# Altium PCB ESP32i.PcbDoc
Units mil, origin at the board's own origin, x right, y up, seen from the top; angles counter-clockwise.
Board outline 1204 x 2188 mil, 2 copper layers (Top Layer, Bottom Layer); 31 components, 46 nets, 190 pads, 88 vias.
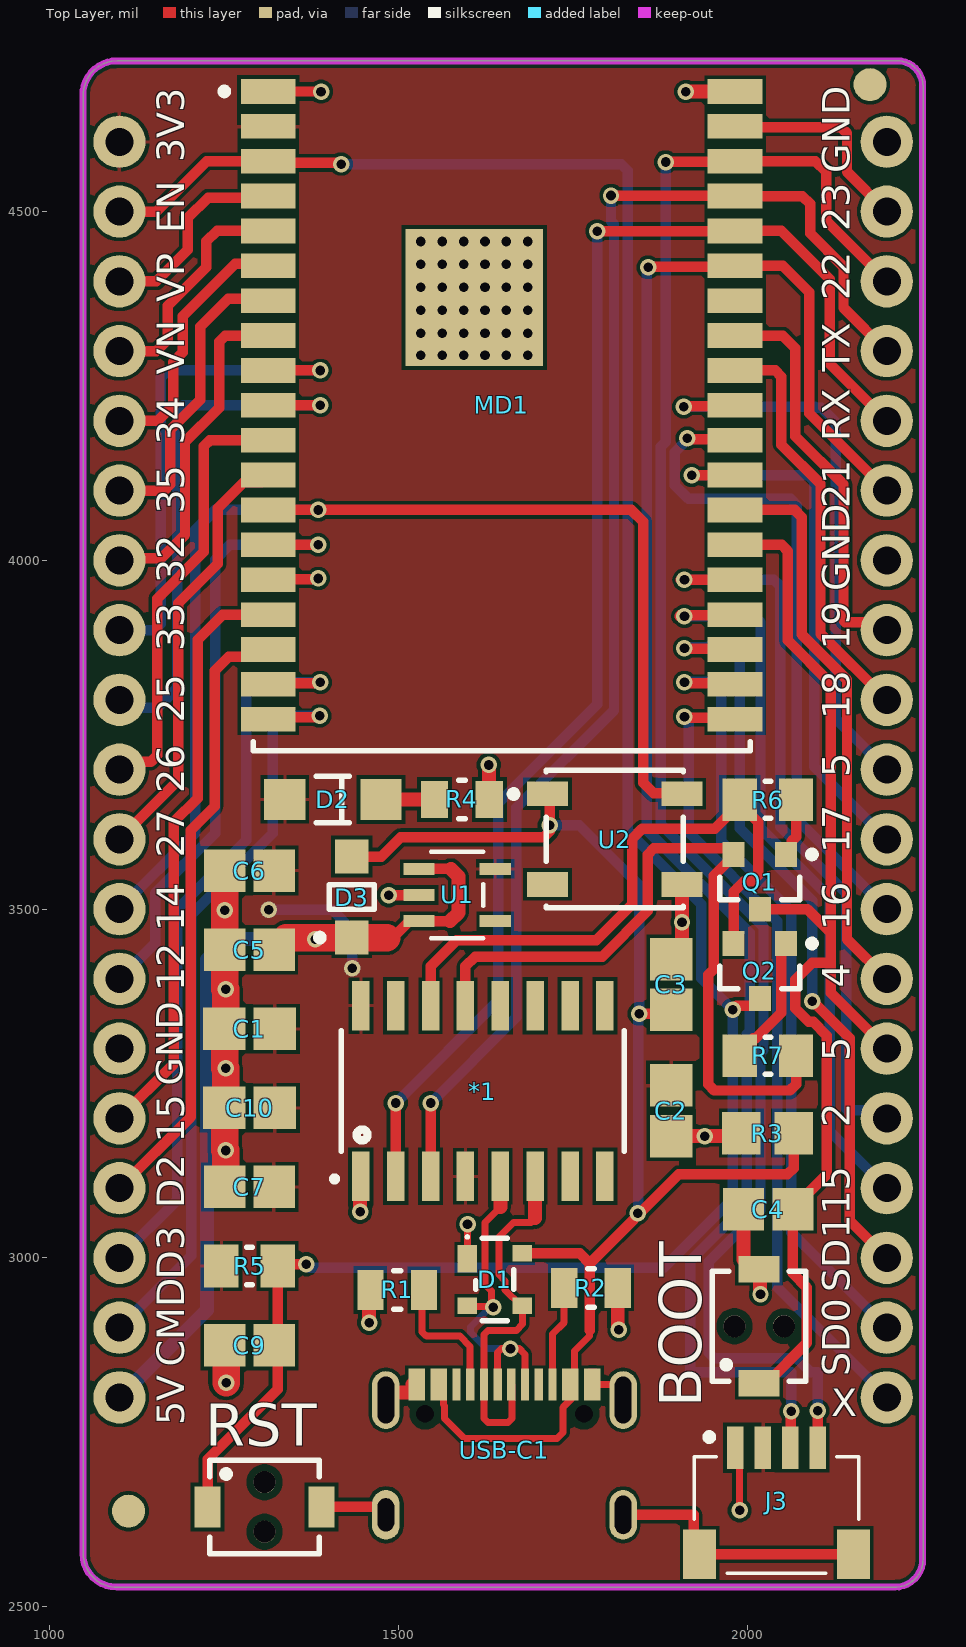
[diagram p0: Top Layer view]
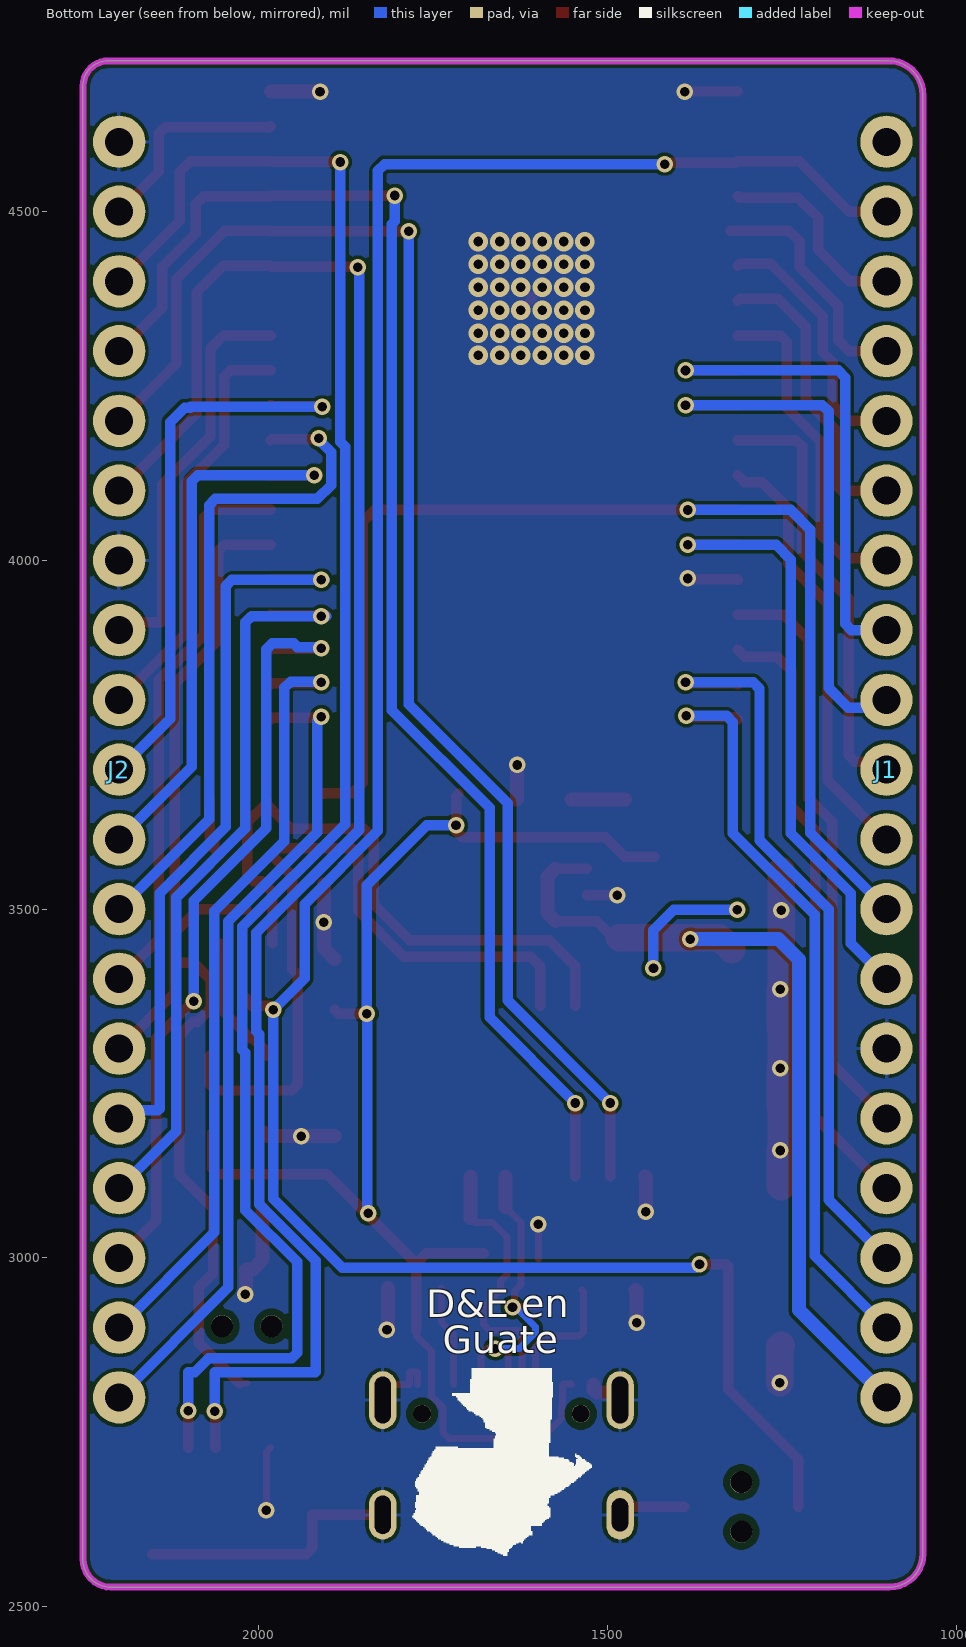
[diagram p1: Bottom Layer view, seen from below]

## Layer stack, top to bottom
Top Solder: solder mask 0.4, Solder Resist, Dk 3.5
Top Layer: signal copper 1.4
Dielectric 1: dielectric 12.6, FR-4, Dk 4.8
Bottom Layer: signal copper 1.4
Bottom Solder: solder mask 0.4, Solder Resist, Dk 3.5

## Board outline
1096,2528 cw(c1096,2576) 1048,2576 1048,4667 cw(c1097,4667) 1097,4716 2216,4716 cw(c2216,4680) 2252,4680 2252,2568 cw(c2212,2568) 2212,2528

## Design rules (kind name [scope] priority, off if disabled: settings)
BoardOutlineClearance [All] p1: gap=7.87 ignorepadtopadclearanceinfootprint=FALSE
Clearance [All] p1: gap=5 ignorepadtopadclearanceinfootprint=FALSE except(5.2: Arc-Fill Arc-Poly Arc-Region Track-Fill Track-Poly Track-Region SMDPad-Fill SMDPad-Poly SMDPad-Region THPad-Fill THPad-Poly THPad-Region Via-Fill Via-Poly Via-Region Fill-Fill Fill-Poly Fill-Region Poly-Poly Poly-Region Region-Region; 9.84: Arc-Hole Track-Hole SMDPad-Hole THPad-Hole Via-Hole Fill-Hole Poly-Hole Region-Hole Text-Hole)
ComponentClearance [All] p1: gap=5 collisioncheckmode=3 verticalgap=5 showdistances=TRUE
DiffPairsRouting [All] p1: maxlimit=10 minlimit=5 mostfreqgap=5 toplayer_minwidth=5 toplayer_maxwidth=1000 toplayer_prefwidth=5 bottomlayer_minwidth=5 bottomlayer_maxwidth=1000 bottomlayer_prefwidth=5 maxuncoupledlength=500
Height [All] p1: minheight=0 maxheight=71497.94 prefheight=500
HoleSize [All] p1: absolutevalues=TRUE maxlimit=248.03 minlimit=11.81 maxpercent=80.000 minpercent=20.000
HoleToHoleClearance [All] p1: gap=9.84 allowstackedmicrovias=FALSE
MinimumAnnularRing [All] p1: minimumring=3
MinimumSolderMaskSliver [All] p1: minsoldermaskwidth=0
PlaneClearance [All] p1: clearance=5
PlaneConnect PlaneConnectPowerPads [InPadClass('PowerPads')] p1: planeconnectstyle=Direct reliefexpansion=20 reliefentries=4 reliefconductorwidth=10 reliefairgap=10
PlaneConnect [All] p2: pad.planeconnectstyle=Relief pad.reliefexpansion=11.81 pad.reliefentries=4 pad.reliefconductorwidth=5 pad.reliefairgap=5 via.planeconnectstyle=Direct via.reliefexpansion=11.81 via.reliefentries=4 via.reliefconductorwidth=5 via.reliefairgap=5
PolygonConnect PolygonConnectPowerPads [All vs (InPadClass('PowerPads'))] p1: connectstyle=Direct reliefconductorwidth=10 reliefentries=4 polygonreliefangle="90 Angle" airgapwidth=10
PolygonConnect [All] p2: thpad.connectstyle=Relief thpad.reliefconductorwidth=5 thpad.reliefentries=4 thpad.polygonreliefangle="90 Angle" thpad.airgapwidth=5 smdpad.connectstyle=Relief smdpad.reliefconductorwidth=5 smdpad.reliefentries=4 smdpad.polygonreliefangle="90 Angle" smdpad.airgapwidth=5 via.connectstyle=Direct via.reliefconductorwidth=5 via.reliefentries=4 via.polygonreliefangle="90 Angle" via.airgapwidth=5
RoutingVias [All] p1: holewidth=11.81 width=23.62 viastyle="Through Hole" minholewidth=13.78 minwidth=23.62 maxholewidth=23.62 maxwidth=259.84
SilkToSilkClearance [All] p1: silktosilkclearance=0
SilkToSolderMaskClearance [IsPad] p1: minsilkscreentomaskgap=5 clearancetoexposedcopper=TRUE
SolderMaskExpansion [All] p1: expansion=2.95 istentingtop=FALSE
Width [All] p1: maxlimit=1000 minlimit=5 preferedwidth=15 minimp=50.000000 maximp=50.000000 favimp=50.000000
20 further rules are at their usual default settings.

## Components (designator, comment, footprint, x,y, rotation, side; value= is the part's Value field where it differs from the comment)
*1 "CH340B" CH340B 1621,3239.24 r90 top
BOOT "IO0" SMT_SW_PTS_820 2017,2902 r90 top (schematic designator S1)
C1 "0.1 uF" CAPC2013X94X50ML20T25 1286.45,3328.39 r0 top
C2 "08055C104KAT2A" CAPC2013X94X50ML20T25 1891,3211 r90 top
C3 "08055C104KAT2A" CAPC2013X94X50ML20T25 1891,3392 r270 top
C4 "1µF" CAPC2013X145X50ML20T25 2030,3070 r0 top
C5 "10µF" CAPC2013X140X50ML20T25 1286.45,3441.74 r0 top
C6 "10µF" CAPC2013X140X50ML20T25 1286.45,3555.09 r0 top
C7 "1µF" CAPC2013X145X50ML20T25 1286.45,3101.7 r0 top
C9 "10µF" CAPC2013X145X50ML20T25 1286.45,2875 r0 top
C10 "0.1 uF" CAPC2013X94X50ML20T25 1286.45,3215.04 r0 top
D1 "PRTR5V0U2X,215" NXP-SOT143B-4_V 1638,2969 r0 top
D2 "HSMG-C150" FP-HSMG-C150-MFG 1406,3657.32 r180 top
D3 "MBR120ESFT1G" ONSC-SOD-123FL-2-498_V 1433,3517.32 r90 top
J1 "PH1-19-UA" PH1-19-UA 1100,4600 r270 bottom
J2 "PH1-19-UA" PH1-19-UA 2200,4600 r270 bottom
J3 "SM04B-SRSS-TB(LF)(SN)" JST_SM04B-SRSS-TB(LF)(SN) 2042,2728 r0 top
MD1 "ESP32-WROVER-I" FP-ESP32-WROVER-I-MFG 1648,4347 r0 top
Q1 "MMBT2222ALT1G" ONSC-SOT-23-3-318-08_V 2018,3539 r270 top
Q2 "MMBT2222ALT1G" ONSC-SOT-23-3-318-08_V 2018,3411.37 r270 top
R1 "5.1K" FP-CRCW0805-e3-MFG 1498,2954 r0 top
R2 "5.1K" FP-CRCW0805-e3-MFG 1776,2957 r180 top
R3 "100k" RESC2013X60X40ML20T25 2029,3179 r0 top
R4 "RP73D2A80R6BTG" FP-RP732A-MFG 1591,3657.32 r180 top value=80.6Ω
R5 "10 k" RESC2013X60X30ML20T20 1286.45,2988.35 r180 top
R6 "10 k" RESC2013X60X30ML20T20 2029.61,3657 r180 top
R7 "10 k" RESC2013X60X30ML20T20 2029.61,3290 r0 top
RST "PTS820J25MSMTRLFS" SMT_SW_PTS_820 1308,2643 r0 top (schematic designator S2)
U1 "XC6210B332MR-G" SOT-25_TOR-M 1584,3520.32 r0 top
U2 "1655" ADA-RGB-1655_V 1810,3600.32 r0 top
USB-C1 "U262-161N-4BVC11" U262-161N-4BVC11 1652,2674 r0 top

## Footprints (in the part's own frame and the unit in brackets; to place one, negate y for a bottom-side part, rotate by r counter-clockwise, add the part's x,y. Pads: shape width x height; smd on the part's side, far side on the other; paste and mask are expansions set on the pad)
ADA-RGB-1655_V [mm] "SMD, 4-Leads, Body 5x5mm"
  rect 1.5x0.9 smd: 1(-2.45,1.65) 2(-2.45,-1.65) 3(2.45,-1.65) 4(2.45,1.65)
  silkscreen extent -3.81,-2.5 2.5,2.5, body extent -2.7,-2.5 2.7,2.5, height 1.68
CAPC2013X94X50ML20T25 [mm] "Chip Capacitor, 2-Leads, Body 2.01x1.25mm, IPC Low Density"
  rect 1.55x1.55 smd: 1(-0.925,0) 2(0.925,0)
  body extent -1.1,-0.72 1.11,0.72, height 0.94
CAPC2013X140X50ML20T25 [mm] "Chip Capacitor, 2-Leads, Body 2.00x1.25mm, IPC Low Density"
  rect 1.5x1.55 smd: 1(-0.9,0) 2(0.9,0)
  body extent -1.1,-0.72 1.1,0.72, height 1.4
CAPC2013X145X50ML20T25 [mm] "Chip Capacitor, 2-Leads, Body 2.00x1.25mm, IPC Low Density"
  rect 1.5x1.55 smd: 1(-0.9,0) 2(0.9,0)
  body extent -1.1,-0.72 1.1,0.72, height 1.45
CH340B [mm] "- USB 2.0 Transceiver 2Mbps SOP-16_150mil USB ICs ROHS"
  rect 1.8x0.64 smd: 1(-3.105,4.445) 2(-3.105,3.175) 3(-3.105,1.905) 4(-3.105,0.635) 5(-3.105,-0.635) 6(-3.105,-1.905) 7(-3.105,-3.175) 8(-3.105,-4.445) 9(3.105,-4.445) 10(3.105,-3.175) 11(3.105,-1.905) 12(3.105,-0.635) 13(3.105,0.635) 14(3.105,1.905) 15(3.105,3.175) 16(3.105,4.445)
  silkscreen extent -3.3,-5.15 2.2,5.5, body extent -3.56,-5.51 3.56,5.51, height 2.14
FP-CRCW0805-e3-MFG [mm]
  rect 0.95x1.45 smd paste+0 mask+0: 1(-0.975,0) 2(0.975,0)
  silkscreen extent -0.13,-0.7 0.13,0.7, body extent -1.55,-0.82 1.55,0.82, height 0.25
FP-ESP32-WROVER-I-MFG [mm]
  rect 2x0.9 smd paste+0 mask+0: 1(-8.5,8.26) 2(-8.5,6.99) 3(-8.5,5.72) 4(-8.5,4.45) 5(-8.5,3.18) 6(-8.5,1.91) 7(-8.5,0.64) 8(-8.5,-0.63) 9(-8.5,-1.9) 10(-8.5,-3.17) 11(-8.5,-4.44) 12(-8.5,-5.71) 13(-8.5,-6.98) 14(-8.5,-8.25) 15(-8.5,-9.52) 16(-8.5,-10.79) 17(-8.5,-12.06) 18(-8.5,-13.33) 19(-8.5,-14.6) 20(8.5,-14.6) 21(8.5,-13.33) 22(8.5,-12.06) 23(8.5,-10.79) 24(8.5,-9.52) 25(8.5,-8.25) 26(8.5,-6.98) 27(8.5,-5.71) 28(8.5,-4.44) 29(8.5,-3.17) 30(8.5,-1.9) 31(8.5,-0.63) 32(8.5,0.64) 33(8.5,1.91) 34(8.5,3.18) 35(8.5,4.45) 36(8.5,5.72) 37(8.5,6.99) 38(8.5,8.26)
  rect 5x5 smd paste+0 mask+0: 39(-1,0.76)
  silkscreen extent -10.22,-15.75 9.05,8.38, body extent -9.6,-15.85 9.6,15.85, height 0.25
FP-HSMG-C150-MFG [mm]
  rect 1.5x1.5 smd paste+0 mask+0: 1(-1.75,0) 2(1.75,0)
  silkscreen extent -0.6,-0.85 0.6,0.85, body extent -2.6,-0.95 2.6,0.95, height 0.25
FP-RP732A-MFG [mm]
  rect 1x1.35 smd paste+0 mask+0: 1(-1,0) 2(1,0)
  silkscreen extent -0.13,-0.7 0.13,0.7, body extent -1.6,-0.8 1.6,0.8, height 0.25
JST_SM04B-SRSS-TB(LF)(SN) [mm]
  rect 0.6x1.55 smd: 1(-1.5,0) 2(-0.5,0) 3(0.5,0) 4(1.5,0)
  rect 1.2x1.8 smd: S1(-2.8,-3.875) S2(2.8,-3.875)
  silkscreen extent -3,-4.57 3,0.48, body extent -3,-4.5 3,0.45, height 2.98
NXP-SOT143B-4_V [mm] "SOT143, 4-Leads, Body 3x1.4mm"
  rect 0.7x1 smd: 1(-1,0.75)
  rect 0.7x0.6 smd: 2(-1,-0.95) 3(1,-0.95) 4(1,0.95)
  silkscreen extent -1.05,-1.5 0.7,1.6, body extent -0.7,-1.5 0.7,1.5, height 1.1
ONSC-SOD-123FL-2-498_V [mm] "SOD, 2-Leads, Body 2.7x1.65mm"
  rect 1.25x1.22 smd: 1(-1.475,0) 2(1.475,0)
  silkscreen extent -1.6,-0.82 0.45,1.28, body extent -1.35,-0.82 1.35,0.82, height 0.98
ONSC-SOT-23-3-318-08_V [mm] "SOT23, 3-Leads, Body 2.92x1.3mm, Pitch 0.95mm"
  rect 0.9x0.8 smd: 1(-1,0.95) 2(-1,-0.95) 3(1,0)
  silkscreen extent -1.12,-1.46 0.65,2.03, body extent -0.65,-1.46 0.65,1.46, height 1.11
PH1-19-UA [mm] "Connector Header Through Hole 19 position 0.100\" (2.54mm)"
  round 1.905 hole 1.02: 1(0,0) 2(2.54,0) 3(5.08,0) 4(7.62,0) 5(10.16,0) 6(12.7,0) 7(15.24,0) 8(17.78,0) 9(20.32,0) 10(22.86,0) 11(25.4,0) 12(27.94,0) 13(30.48,0) 14(33.02,0) 15(35.56,0) 16(38.1,0) 17(40.64,0) 18(43.18,0) 19(45.72,0)
  body extent -1.27,-1.27 46.99,1.27, height 8.54
RESC2013X60X30ML20T20 [mm] "Chip Resistor, 2-Leads, Body 2.00x1.25mm, IPC Low Density"
  rect 1.25x1.55 smd: 1(-1.025,0) 2(1.025,0)
  silkscreen extent -0.1,-0.67 0.1,0.67, body extent -1.1,-0.72 1.1,0.72, height 0.6
RESC2013X60X40ML20T25 [mm] "Chip Resistor, 2-Leads, Body 2.00x1.25mm, IPC Low Density"
  rect 1.4x1.55 smd: 1(-0.95,0) 2(0.95,0)
  body extent -1.1,-0.72 1.1,0.72, height 0.6
SMT_SW_PTS_820 [mm]
  rect 0.95x1.5 smd: 1(-2.075,0) 2(2.075,0)
  round 0.8 hole 0.8 unplated: MH1(0,0.9) MH2(0,-0.9)
  silkscreen extent -2,-1.7 2,1.7, body extent -2.25,-1.55 2.25,1.55, height 2.05
SOT-25_TOR-M [mil]
  rect 44.5x17 smd paste+0 mask+0: 1(-54.75,37.4) 2(-54.75,0) 3(-54.75,-37.4) 4(54.75,-37.4) 5(54.75,37.4)
  silkscreen extent -38,-62 38,62, body extent -55,-57 55,57, height 51
U262-161N-4BVC11 [mm] "USB-C"
  rect 0.3x1.15 smd: A1(-3.35,3.67) A4(-2.55,3.67) A5(-1.25,3.67) A6(-0.25,3.67) A7(0.25,3.67) A8(1.25,3.67) A9(2.55,3.67) A12(3.35,3.67) B1(3.05,3.67) B4(2.25,3.67) B5(1.75,3.67) B6(0.75,3.67) B7(-0.75,3.67) B8(-1.75,3.67) B9(-2.25,3.67) B12(-3.05,3.67)
  rrect100% 1x1.8 hole 1.2 slot 0.6 at 0 deg: S1(-4.32,-1.075)
  rrect100% 1x1.8 on Top Paste: S1(-4.318,-1.092) S1(4.318,-1.067)
  rrect100% 1x2.1 hole 1.7 slot 0.6 at 0 deg: S2(-4.32,3.105) S3(4.32,3.105)
  rrect100% 1x2.1 on Top Paste: S2(-4.318,3.124) S2(4.318,3.124)
  rrect100% 1x1.8 hole 1.4 slot 0.6 at 0 deg: S4(4.32,-1.075)
  round 0 / inner round 0.65 / far side round 0.65 hole 0.65: Un1(2.89,2.605) Un2(-2.89,2.605)
  body extent -4.45,-3.55 4.45,4.01, height 3.33

## Part data
*1: "- USB 2.0 Transceiver 2Mbps SOP-16_150mil USB ICs ROHS", ComponentLink1Description=Datasheet, ComponentLink1URL=https://www.mpja.com/download/35227cpdata.pdf
BOOT: library part PTS820J25MSMTRLFS
C1 C2 C3 C10: library part CMP-2000-05016-1, "Chip Capacitor, Ceramic, 0.1 uF, 10%, 50 V, 0805, RoHS, Tape and Reel", Capacitance=100nF, Case Size/Dimension=0805, Dielectric=X7R, Manufacturer=AVX, Rated Voltage=50V, Tolerance (%)=±10%, Datasheet URL=http://www.farnell.com/datasheets/319609.pdf, Datasheet Version=Sep-07, Manufacturer URL=http://www.avx.com/
C4 C7 C9: library part CMP-2007-01082-1, "1µF ±10% 16V Ceramic Capacitor X7R 0805 (2012 Metric)", Manufacturer=Kemet, Part Number=C0805C105K4RAC7800
C5 C6: library part CMP-2007-03242-1, "10µF ±10% 16V Ceramic Capacitor X5R 0805 (2012 Metric)", Part Number=CL21A106KOQNNNG
D1: library part CMP-2000-05285-1, "Ultra Low Capacitance Double Rail-to-Rail ESD Protection Diode, 5.5 V, 1 pF, -40 to 85 degC, 4-Pin SOT143B, RoHS, Tape and Reel", Capacitance Value=16pF, ESD Protection Voltage=8KV@ContactDisc, Leakage Current=0.1uA, Manufacturer="NXP Semiconductors", Operating Temp Range=-40Cto85C, Operating Temperature Classification=Industrial, Operating Temperature Max Deg. C=85C, Operating Temperature Min Deg. C=-40C, Package / Case=SOT, Reverse Breakdown Voltage=6V, Reverse Stand-off Voltage=5.5V, Configuration=Quad, Datasheet URL=https://datasheet.ciiva.com/4479/prtr5v0u2x-102853-4479461.pdf, Datasheet Version="Rev. 02, 01/2008", Direction Type=Uni-Directional, Leakage Current (Max)=0.1uA, Manufacturer URL=http://www.nxp.com/, Mounting=SurfaceMount, Mounting Style=SurfaceMount, Number of Elements=1, Package Type=SOT, Packaging=TapeandReel, Pin Count=3+Tab, Polarity=Uni-Directional, Product Depth (mm)=1.4mm, Product Height (mm)=1mm, Product Length (mm)=3mm, Rad Hardened=No, Suppressor Type=DiodeArrays, Working Voltage=5.5V, Working Voltage (Max)=5.5V
D2: library part CMP-2000-05061-2, "LED GREEN DIFFUSED 1206 SMD", Colour=Green, Forward Current=20mA, Forward Voltage=2.2V, Manufacturer=Broadcom, Max Junction Temp=+95°C, Power Dissipation=65mW, Reverse Voltage=5V, Temperature="-40°C to +85°C", Temperature Range High=+85°C, Temperature Range Low=-40°C, Automotive=No, Category=Diode, ComponentLink2Description=Datasheet, ComponentLink2URL=https://docs.broadcom.com/docs/AV02-0551EN, Device Class L1=Optoelectronics, Device Class L2=LEDs, Device Class L3=unset, Digikey Description="LED GREEN DIFFUSED 1206 SMD", Height=1.2mm, Ipc Land Pattern Name=DIOCP320160X55, Lead Free=Yes, Led Orientation="Top View", Luminous Intensity=15mcd, Manufacturer Part Number=HSMG-C150, Mouser Description="LED Uni-Color Green 570nm 2-Pin Chip LED T/R", Octopart=https://octopart.com/hsmg-c150-broadcom-71131304, Package=HSMG-C150, Peak Emmision Wavelength=570nm, RoHS=TRUE, Viewing Angle=170°, Wavelength=572nm
D3: library part CMP-1055-00434-1, "Schottky Power Rectifier, 2-Pin SOD-123, Pb-Free, Tape and Reel", Manufacturer="On Semiconductor", ComponentLink1Description="Manufacturer URL", ComponentLink1URL=http://www.onsemi.com/, ComponentLink2Description=Datasheet, ComponentLink2URL=http://www.onsemi.cn/pub_link/Collateral/MBR120ESFT1-D.PDF, ComponentLink3Description="Package Specification", ComponentLink3URL=http://www.onsemi.com/pub_link/Collateral/498-01.PDF, Configuration=Single, DatasheetVersion="Rev. 4", IFSM Max (A)=40, Mounting Technology="Surface Mount", PackageDescription="2-Pin SOD, Body 1.65 x 2.7 mm", PackageReference=SOD-123FL-2-498, PackageVersion="Rev. D, 05/2013", Packing="Tape and Reel", PartNumber=MBR120ESFT1G, RoHS=TRUE
J1 J2: "Connector Header Through Hole 19 position 0.100\" (2.54mm)", Supplier Part Number 1=2057-PH1-19-UA-ND, Supplier 1=Digi-Key
J3: "Connector Header Surface Mount, Right Angle 4 position 0.039 _1.00mm_", Package=None, Availability=Unavailable, MF="JST Sales", MP=SM04B-SRSS-TB_LF__SN_, Price=None, SnapEDA_Link=https://www.snapeda.com/parts/SM04B-SRSS-TB%28LF%29%28SN%29/JST%20Sales%20America%20Inc./view-part/557466/?ref=snap
MD1: library part CMP-194065-000001-1, "SMD MODULE, ESP32-D0WDQ6, 32MBIT", Manufacturer=Espressif, Max Frequency=2484MHz, Max Supply Voltage=3.6V, Min Supply Voltage=2.3V, Nominal Supply Current=500mA, Temperature="-40°C to +85°C", Temperature Range High=+85°C, Temperature Range Low=-40°C, Automotive=No, Category=UNK, ComponentLink2Description=Datasheet, ComponentLink2URL=https://www.espressif.com/sites/default/files/documentation/esp32-wrover_datasheet_en.pdf, Data Rate=150Mbits/s, Device Class L1="Integrated Circuits (ICs)", Device Class L2="RF Semiconductors and Devices", Device Class L3=Transceivers, Digikey Description="SMD MODULE, ESP32-D0WDQ6, 32MBIT", Height=3.4mm, Interface=I2C,SPI,UART,I2S,Other, Lead Free=Yes, Manufacturer Part Number=ESP32-WROVER-I, Number Of Adc Channels=16, Number Of Gpio=20, Octopart=https://octopart.com/esp32-wrover-i-espressif+systems-89171349, Package=ESP32-WROVER-I, RoHS=TRUE, Sensitivity=-98dBm
Q1 Q2: library part CMP-1048-00538-1, "General Purpose Transistor, NPN Silicon, 3-Pin SOT-23, Pb-Free, Tape and Reel", Manufacturer="On Semiconductor", ComponentLink1Description="Manufacturer URL", ComponentLink1URL=http://www.onsemi.com/, ComponentLink2Description=Datasheet, ComponentLink2URL=http://www.onsemi.cn/pub_link/Collateral/MMBT2222LT1-D.PDF, ComponentLink3Description="Package Specification", ComponentLink3URL=http://www.onsemi.cn/pub_link/Collateral/318-08.PDF, DatasheetVersion="Rev. 10", fT Min (MHz)=300, IC Continuous (A)=0.6, Mounting Technology="Surface Mount", PackageDescription="3-Pin Small Outline Transistor, Body 2.92 x 1.3 mm, Pitch 0.95 mm", PackageReference=SOT-23-3-318-08, PackageVersion="Rev. AP, 11/2009", Packing="Tape and Reel", PartNumber=MMBT2222ALT1G, Polarity=NPN, RoHS=TRUE
R1 R2: library part CMP-2001-04024-2, "RES Thick Film, 5.1kΩ, 1%, 0.125W, 100ppm/°C, 0805", Case Code (Imperial)=0805, Case Code (Metric)=2012, Max Operating Temperature=155°C, Max Power Dissipation=125mW, Min Operating Temperature=-55°C, Package Quantity=10, Resistance=5.1kR, Temperature Coefficient=100ppm/°C, Tolerance=1%, Voltage Rating=150V, Case/Package=0805, Composition="Thick Film", Contact Plating=Tin, Depth=1.25mm, Features="Automotive AEC-Q200", Height=0.45mm, Lead Free="Lead Free", Length=2mm, Military Standard=Not, Mount="Surface Mount", Number of Terminations=2, Packaging="Tape and Reel", Power Rating=125mW, Radiation Hardening=No, Termination=SMD/SMT, Voltage Rating (DC)=150V, Weight=0.000194oz, Width=0.049inch
R3: library part CMP-2001-00583-1, "100 kOhms ±0.1% 0.125W, 1/8W Chip Resistor 0805 (2012 Metric) Automotive AEC-Q200 Thin Film", Manufacturer=Panasonic, Part Number=ERA6AEB104V
R4: library part CMP-03211-002377-1, "RESISTOR, 0805 80.6Ω, 0.1% 15ppm/°C", Manufacturer="TE Connectivity", Package=RP732A, Power Rating=0.125W, Resistance=80.6Ω, Temperature="-55°C to 155°C", Temperature Coefficient=15ppm/°C, Temperature Range High=155°C, Temperature Range Low=-55°C, Tolerance=0.1%, Voltage Rating=150V, Automotive=No, Category=Res, ComponentLink2Description=Datasheet, ComponentLink2URL=https://www.te.com/commerce/DocumentDelivery/DDEController?Action=srchrtrv&DocNm=1773272&DocType=DS&DocLang=English, Composition="Thin Film", Device Class L1="Passive Components", Device Class L2=Resistors, Device Class L3="Chip SMD Resistors", Height=0.65mm, Ipc Land Pattern Name=RESC200125X55, Lead Free=Yes, Manufacturer Part Number=RP73D2A80R6BTG, Octopart=https://octopart.com/rp73d2a80r6btg-te+connectivity-42011633, octopart_url=https://octopart.com/rp73d2a80r6btg-te+connectivity-42011633, Packaging="250 cut tape length", RoHS=TRUE, Series=RP73
R5 R6 R7: library part CMP-2001-04657-1, "10 kOhms ±5% 0.25W, 1/4W Chip Resistor 0805 (2012 Metric) Automotive AEC-Q200, Moisture Resistant Thick Film", Manufacturer="KOA Speer", Part Number=RK73B2ATTD103J
U1: "No Description Available", Mfr_Name="Torex Semiconductor", Copyright="Copyright (C) 2022 Ultra Librarian. All rights reserved.", Manufacturer_Part_Number=XC6210B332MR-G, RefDes=RefDes, Type=DEV
U2: library part CMP-2000-05026-1, "Intelligent Control LED Integrated Light Source, 3.5 to 5.3 V, -25 to 80 degC, 4-Pin SMD, RoHS, Tape and Reel", Color=Red,Green,Blue(RGB), Manufacturer=Adafruit-Industries-LLC, Package Description="4-Pin Surface Mount Device, Body 5 x 5 mm", Category=Optoelectronics, Configuration=Discrete, Controller Type=-, Datasheet URL=http://datasheet.octopart.com/ADA1655-Adafruit-Industries-datasheet-32028139.pdf, Datasheet Version=May-13, Family=Addressable,Specialty, Interface=-, Manufacturer URL=https://www.adafruit.com/, Mounting Type=SurfaceMount, Number of LEDs=10, Package Reference=1655, Series=Neopixel, Size / Dimension=5.00mmLx5.00mmW, Utilized LED=WS2812(5050)
USB-C1: "USB - Type C Female 16 SMT USB Connectors RoHS", ComponentLink1Description=datasheet, ComponentLink1URL=https://datasheet.lcsc.com/szlcsc/2002271811_XKB-Connectivity-U262-161N-4BVC11_C319148.pdf, ComponentLink2Description="LCSC Link", ComponentLink2URL=https://lcsc.com/product-detail/USB-Connectors_XKB-Connectivity-U262-161N-4BVC11_C319148.html

## Free pads (board coordinates)
  round 47.24 smd: 1(1113,2637) 1(2176,4682)

## Via types
v1: diameter 23.62, hole 13.78, Top Layer to Bottom Layer, tented both sides, 52 vias
v2: diameter 28, hole 13.78, Top Layer to Bottom Layer, tented bottom, 36 vias

## Nets (pads, with @x,y where several pads share a name; then routed paths per layer and width w, separated by ;. In a path a pad name is that pad's centre, name@x,y a point inside that pad or via, vN(x,y) a via of type N, cw(c..) or ccw(c..) an arc to the next point about the centre after c; other vN are vias at no path point)
3V3: *1.4 *1.16 C1.2 C2.2 C6.2 C7.2 C10.2 D2.2 J1.1 J3.2 MD1.2 R5.2 U1.5 | length 187
  Bottom Layer w15: v1(1314,3499) 1405,3499 1434,3470 v1(1434,3415)
5v_ext: C5.2 D3.1 J1.19 U1.1 U1.3 | length 1247.5
  Top Layer w15: 1483,3459 1491.59,3459 1515.5,3482.91 U1.3 1574.13,3482.91 ; U1.1 1575.28,3557.72
  Top Layer w20: 1574.13,3482.91 1586,3494.79 1586,3547 1575.28,3557.72
  Top Layer w39.37: C5.2 1321.88,3442.73 1331.72,3452.57 1332.71,3452.57 1339.38,3459.24 D3.1 1433.24,3459 1483,3459
  Bottom Layer w20: J1.19 1225.5,2925.5 1225.5,3427.5 1255,3457 v1(1381,3457)
CLK: J2.19 MD1.20 | length 1170.3
  Top Layer w15: v1(1910,3776) 1911.65,3774.35 1980.49,3774.35 MD1.20
  Bottom Layer w15: v1(1910,3776) 1915.86,3770.14 1915.86,3610.14 2043.31,3482.69 2043.31,2957.92 2200,2801.23 J2.19
CMD: J1.18 MD1.19 | length 1105.6
  Top Layer w15: MD1.19 1316.51,3775.35 1385.35,3775.35 v1(1387,3777)
  Bottom Layer w15: J1.18 1203,3003 1203,3491.72 1320,3608.72 1320,3768.21 1328.79,3777 v1(1387,3777)
D+: *1.5 D1.2 USB-C1.A6 USB-C1.B6 | length 492.3
  Top Layer w10: D1.2 1599.93,2930.3 v1@1634.7,2930.3 ; v1(1636,2929) v1@1634.7,2930.3 ; USB-C1.A6 1642.16,2864.14 1648.02,2870 v1(1660.58,2870) 1673.14,2870 1681.53,2861.61 USB-C1.B6 ; 1646,3072.94 1624,3050.94 1624,2962 1633.39,2952.61 1633.39,2931.61 v1@1634.7,2930.3
  Top Layer w20: 1646,3072.94 *1.5
  Bottom Layer w10: v1(1636,2929) 1631,2929 1603.14,2901.14 1603.14,2892.86 1626,2870 v1(1660.58,2870)
D-: *1.6 D1.3 USB-C1.A7 USB-C1.B7 | length 540
  Top Layer w10: USB-C1.A7 1662.75,2817.58 1662.75,2780.85 1663,2780.6 1663,2769.86 1657.14,2764 1628.33,2764 1622.47,2769.86 USB-C1.B7 1622.47,2890.14 1628.33,2896 1669,2896 1678,2905 1678,2930.97 D1.3 1675.4,2931.6 1653,2954 1653,2967 1644,2976 1644,3030 1665,3051 1690.14,3051 1696,3056.86
  Top Layer w20: 1696,3056.86 *1.6
DTR: *1.13 Q1.2 R7.2 | length 1081.3
  Top Layer w15: *1.13 1596,3418 1610,3432 1791.82,3432 1857.5,3497.68 1857.5,3578.21 1866.29,3587 1972.35,3587 1980.6,3578.75 Q1.2 1980.6,3576.4 1952,3547.8 1952,3413.89 1944,3405.89 1944,3248.79 1952.79,3240 2061.18,3240 2069.97,3248.79 R7.2
EN: C9.2 J1.2 MD1.3 Q2.3 R5.1 RST.1 | length 3430.2
  Top Layer w15: J1.2 1153,4500 1225,4572 MD1.3@1313.35,4572 ; RST.1 1226.31,2711.31 1326.8,2811.8 R5.1 1329.45,2991 v1(1368,2991) ; MD1.3 1315.9,4569.65 1416.35,4569.65 v1(1418,4568) ; v1(1979,3356) 1984.78,3361.78 2009.75,3361.78 2018,3370.03 Q2.3
  Bottom Layer w15: v1(1368,2991) 1373,2986 1880,2986 1979,3085 v1(1979,3356) 1934,3401 1934,3507.15 1829,3612.15 1829,4558.38 1819.38,4568 v1(1418,4568)
GND: *1.1 BOOT.2 C1.1 C2.1 C3.1 C4.1 C5.1 C6.1 C7.1 C9.1 C10.1 D1.1 J1.14 J2.1 J2.7 J3.1 J3.S1 J3.S2 MD1.1 MD1.15 MD1.38 MD1.39 R1.1 R2.1 R3.1 R4.1 RST.2 U1.2 U2.3 USB-C1.A1 USB-C1.A12 USB-C1.B1 USB-C1.B12 USB-C1.S1@1481.92,2631.68 USB-C1.S2@1481.92,2796.24 USB-C1.S3 USB-C1.S4 | length 2111.1
  Top Layer w10: D1.1 1598.82,2998.71 1598.82,3047.82 v1(1599,3048) ; USB-C1.B1 1772.08,2835.22 1772.98,2836.13 1782.98,2836.13 1783.89,2835.22 USB-C1.A12 1808.51,2818.49 1822.08,2804.92 USB-C1.S3 ; J3.1 1989,2721.94 v1(1989,2638)
  Top Layer w15: MD1.15 1314.26,3973.1 1384.1,3973.1 v1(1385,3974) ; MD1.1 1313.45,4672.1 1388.9,4672.1 v1(1389,4672) ; RST.2 1470.66,2643 1481.92,2631.74 USB-C1.S1@1481.92,2631.68 ; v1(1486,3520) 1486.16,3520.16 1529.09,3520.16 U1.2 ; MD1.39 1608.63,4375.37 MD1.39@1611,4373 ; USB-C1.S4 1922.98,2631.68 1922.98,2584.23 J3.S1 J3.S2
  Top Layer w20: v1(1445,3066) 1445,3116 *1.1 ; v1(1458,2907) 1458,2952.39 R1.1 ; USB-C1.S2@1481.92,2796.24 1481.92,2798.42 1490.87,2807.37 1516.02,2807.37 1520.11,2811.46 USB-C1.A1 ; v1(1629.36,3706.65) 1629.86,3706.14 1629.86,3657.82 R4.1 ; R2.1 1814.39,2899.59 1816,2897.98 v1(1816,2897) ; C2.1 v1(1939.09,3174.58) 1987.18,3174.58 R3.1 ; C3.1 1906.46,3443.87 v1(1906.46,3481) U2.3 ; v1(1912,4672) 1912.1,4672.1 1982.55,4672.1 MD1.38 ; C4.1 1994.57,2997.39 2008.27,2983.69 BOOT.2 2018.31,2982.39 2018.31,2948.69 v1(2019,2948)
  Top Layer w39.37: C9.1 1253,2873.01 v1(1253,2821) ; C7.1 1252.31,3102.99 v1(1252.31,3154) ; v1@1251.01,3154 1251.01,3215.04 1252.31,3216.34 v1(1252.31,3272) ; v1@1251.01,3272 1251.01,3328.39 1252.31,3329.69 v1(1252.31,3385) ; v1@1251.01,3385 C5.1 v1(1251.01,3498.42) C6.1
  other v2: 1532.2,4294 1562.8,4294 1593.4,4294 1624,4294 1654.6,4294 1685.2,4294 1532.2,4325.8 1562.8,4325.8 1593.4,4325.8 1624,4325.8 1654.6,4325.8 1685.2,4325.8 1532.2,4358.6 1562.8,4358.6 1593.4,4358.6 1624,4358.6 1654.6,4358.6 1685.2,4358.6 1532.2,4391.4 1562.8,4391.4 1593.4,4391.4 1624,4391.4 1654.6,4391.4 1685.2,4391.4 1532.2,4424.2 1562.8,4424.2 1593.4,4424.2 1624,4424.2 1654.6,4424.2 1685.2,4424.2 1532.2,4457 1562.8,4457 1593.4,4457 1624,4457 1654.6,4457 1685.2,4457
IO0: BOOT.1 C4.2 J2.14 MD1.25 Q1.3 | length 1692.4
  Top Layer w10: BOOT.1 BOOT.1@2027.83,2820.31
  Top Layer w15: MD1.25 2049.21,4022.2 2058,4013.41 2058,3885.43 2120,3823.43 2120,3466 ; Q1.3 2086.37,3499.63 2120,3466 ; BOOT.1@2027.83,2820.31 2085.52,2878 2085.52,2957.6 2065.43,2977.69 C4.2 2065.43,3070.98 2114,3119.55 2114,3318.76 2094.42,3338.35 2088.27,3338.35 2068.69,3357.93 2068.69,3398.69 2093,3423 2120,3423 ; J2.14 2120,3380 2120,3423 ; 2120,3423 2120,3466
IO2: J2.15 MD1.24 | length 1075.9
  Top Layer w15: v1@1905,3972 1905.2,3972.2 MD1.24
  Bottom Layer w15: v1@1905,3972 2038.21,3972 2047,3963.21 2047,3618 2142,3523 2142,3213.79 2144.31,3211.48 2188.52,3211.48 J2.15
  other v1: 1910,3972
IO4: J2.13 MD1.26 | length 812.1
  Top Layer w15: MD1.26 2067.8,4072.2 2078,4062 2078,3893.72 2143,3828.72 2143,3457 J2.13
IO5: J2.10 MD1.29 | length 829.9
  Top Layer w15: v1(1909,4220) 1910.1,4221.1 1981.55,4221.1 MD1.29
  Bottom Layer w15: v1(1909,4220) 2097,4220 2098,4219 2106,4219 2127,4198 2127,3773 J2.10
IO12: J1.13 MD1.14 | length 886.1
  Top Layer w15: MD1.14 v1(1385,4022.2)
  Bottom Layer w15: J1.13 1151,3451 1151,3523 1237.07,3609.07 1237.07,4001 1258.27,4022.2 v1(1385,4022.2)
IO13: J1.15 MD1.16 | length 848.7
  Top Layer w15: J1.15 1178,3278 1178,3625 1212,3659 1212,3886 1248.2,3922.2 MD1.16
IO14: J1.12 MD1.13 U2.4 | length 1757.6
  Top Layer w15: MD1.13 v1(1385,4072.2) 1833.8,4072.2 1851,4055 1851,3681 1866,3666 1905.73,3666 U2.4
  Bottom Layer w15: J1.12 1100,3500.28 1209,3609.28 1209,4044 1237.2,4072.2 v1(1385,4072.2)
IO15: J2.16 MD1.23 | length 1086.4
  Top Layer w15: v1@1903,3920 1904.1,3921.1 1981.55,3921.1 MD1.23
  Bottom Layer w15: v1@1903,3920 2010.21,3920 2019,3911.21 2019,3616 2118.31,3516.69 2118.31,3181.69 J2.16
  other v1: 1910,3920
IO16: J2.12 MD1.28 | length 964
  Top Layer w15: v1(1914,4175) 1915.4,4173.6 1981.24,4173.6 MD1.28
  Bottom Layer w15: v1(1914,4175) 1914,4172.67 1896,4154.67 1896,4107.79 1915.79,4088 2062.21,4088 2071,4079.21 2071,3629 J2.12
IO17: J2.11 MD1.27 | length 798
  Top Layer w15: v1(1920.31,4122) 1920.41,4122.1 1982.55,4122.1 MD1.27
  Bottom Layer w15: v1(1920.31,4122) 2087.21,4122 2096,4113.21 2096,3704 J2.11
IO18: J2.9 MD1.30 | length 596
  Top Layer w15: MD1.30 2040.21,4272.2 2049,4263.41 2049,4166 2105,4110 2105,3895 J2.9
IO19: J2.8 MD1.31 | length 580.3
  Top Layer w15: MD1.31 2050.8,4322.2 2069,4304 2069,4178 2138,4109 2138,3914 2140.52,3911.48 2188.52,3911.48 J2.8
IO21: J2.6 J3.3 MD1.33 | length 2511.9
  Top Layer w15: v1(1858,4420) 1859.1,4421.1 1981.55,4421.1 MD1.33 2050.8,4422.2 2089,4384 2089,4211 J2.6 ; J3.3 2062.34,2728.66 2062.34,2779.34 v1(2063,2780)
  Bottom Layer w15: v1(1858,4420) 1856,4418 1856,3613.43 2003.31,3466.12 2003.31,3325.18 1999,3320.87 1999,3076.72 1918,2995.72 1918,2837 1919,2836 2063,2836 v1(2063,2780)
IO22: J2.3 J3.4 MD1.36 | length 2509.1
  Top Layer w15: v1(1883,4571) 1883.6,4571.6 1982.05,4571.6 MD1.36 2097.8,4572.2 2113,4557 2113,4487 J2.3 ; J3.4@2101.03,2728.03 v1(2101,2781)
  Bottom Layer w15: v1(1883,4571) 1883,4169.95 1876,4162.95 1876,3621.72 2023.31,3474.4 2023.31,3298.31 2019,3294 2019,3068.43 1944.87,2994.3 1944.87,2863.87 1952.74,2856 2071.28,2856 2091.28,2836 2101,2836 v1(2101,2781)
IO23: J2.2 MD1.37 | length 300.3
  Top Layer w15: MD1.37 1983.84,4621 2134.21,4621 2143,4612.21 2143,4557 J2.2
IO25: J1.9 MD1.10 | length 778.8
  Top Layer w15: MD1.10 v1(1388,4222.2)
  Bottom Layer w15: J1.9 1111,3789 1155,3789 1183,3817 1183,4213.41 1191.79,4222.2 v1(1388,4222.2)
IO26: J1.10 MD1.11 | length 629.3
  Top Layer w15: J1.10 1111.48,3711.48 1145.21,3711.48 1154,3720.27 1154,3945 1221,4012 1221,4163.41 1229.79,4172.2 MD1.11
IO27: J1.11 MD1.12 | length 625.1
  Top Layer w15: J1.11 1184.5,3684.5 1184.5,3938.5 1241,3995 1241,4074.61 1278.37,4111.98 1303.14,4111.98 MD1.12
IO32: J1.7 MD1.8 | length 479.9
  Top Layer w15: J1.7 1103,4003 1160,4003 1194,4037 1194,4170 1243,4219 1243,4313.21 1251.79,4322 1313.16,4322 MD1.8
IO33: J1.8 MD1.9 | length 723.7
  Top Layer w15: MD1.9 v1(1388,4272.2)
  Bottom Layer w15: J1.8 1150.21,3900 1159,3908.79 1159,4262 1169.2,4272.2 v1(1388,4272.2)
IO34: J1.5 MD1.6 | length 374.5
  Top Layer w15: J1.5 1155,4200 1177,4222 1177,4284 1191,4298 1191,4350 1265.96,4424.96 1310.59,4424.96 MD1.6
IO35: J1.6 MD1.7 | length 435.7
  Top Layer w15: J1.6 1164.21,4100 1173,4108.79 1173,4187 1216,4230 1216,4335 1256,4375 1310.55,4375 MD1.7
NetD2_1: D2.1 R4.2 | length 76.7
  Top Layer w20: D2.1 R4.2
NetQ1_1: Q1.1 R6.1 | length 84.7
  Top Layer w15: Q1.1 2063.65,3586.62 2063.65,3597.67 2069.97,3603.99 R6.1
NetQ2_1: Q2.1 R7.1 | length 190.4
  Top Layer w15: R7.1 1989.26,3295.91 2008.42,3315.07 2012.21,3315.07 2048.69,3351.55 2048.69,3444.03 Q2.1
NetR1_2: R1.2 USB-C1.A5 | length 193.2
  Top Layer w10: R1.2 1534,2951.61 1534,2893.86 1539.86,2888 1588,2888 1602.79,2873.21 USB-C1.A5
NetR2_2: R2.2 USB-C1.B5 | length 145.4
  Top Layer w10: USB-C1.B5 1720.9,2890.9 1737.61,2907.61 R2.2
RTS: *1.14 Q2.2 R6.2 | length 890.1
  Top Layer w15: *1.14 1546,3418 1583.5,3455.5 1783.5,3455.5 1835,3507 1835,3601 1849.14,3615.14 1953.31,3615.14 R6.2@1989.26,3651.09 ; Q2.2 1980.6,3524.81 1995.79,3540 2007.21,3540 2016,3548.79 2016,3624.35 R6.2@1989.26,3651.09 ; R6.2 R6.2@1989.26,3651.09
RXD0: *1.2 J2.5 MD1.34 | length 2073.6
  Top Layer w15: *1.2 v1(1496,3222) ; v1(1784.69,4472) 1784.79,4472.1 1982.55,4472.1 MD1.34 2048.8,4472.2 2118,4403 2118,4282 J2.5
  Bottom Layer w15: v1(1496,3222) 1643,3369 1643,3652 1784.69,3793.69 v1(1784.69,4472)
SD0: J2.18 MD1.21 | length 1148.2
  Top Layer w15: v1@1909,3825 1910.4,3823.6 1981.24,3823.6 MD1.21
  Bottom Layer w15: v1@1909,3825 1910,3826 1954.21,3826 1963,3817.21 1963,3597 2063.31,3496.69 2063.31,3036.69 J2.18
  other v1: 1910,3825
SD1: J2.17 MD1.22 | length 1119.1
  Top Layer w15: v1(1910,3874) 1910.9,3873.1 1981.74,3873.1 MD1.22 ; v1(2093,3368) 2094,3368 2147,3315 2147,3053 J2.17
  Bottom Layer w15: v1(1910,3874) 1911.54,3875.54 1944.31,3875.54 1949.77,3881 1980.21,3881 1989,3872.21 1989,3616 2093,3512 v1(2093,3368)
SD2: J1.16 MD1.17 | length 887.7
  Top Layer w15: J1.16 1202,3202 1202,3613 1236.43,3647.43 1236.43,3841.54 1256.87,3861.98 1303.14,3861.98 MD1.17
SD3: J1.17 MD1.18 | length 1077
  Top Layer w15: MD1.18 1314.76,3823.6 1386.6,3823.6 v1(1388,3825)
  Bottom Layer w15: J1.17 1183,3083 1183,3500 1282,3599 1282,3816.21 1290.79,3825 v1(1388,3825)
TXD0: *1.3 J2.4 MD1.35 | length 2063.6
  Top Layer w15: *1.3 v1(1546,3222) ; v1(1804.69,4523) 1805.09,4522.6 1982.24,4522.6 MD1.35 2078.8,4522.2 2090,4511 2090,4468.62 2138,4420.62 2138,4362 J2.4
  Bottom Layer w15: v1(1546,3222) 1669,3345 1669,3645 1809,3785 1809,4482.07 1804.69,4486.38 v1(1804.69,4523)
VBUS: C3.2 D1.4 D3.2 R3.2 U2.1 USB-C1.A4 USB-C1.A9 USB-C1.B4 USB-C1.B9 | length 2044.6
  Top Layer w10: USB-C1.A4 1552.51,2819.39 1562.51,2819.39 USB-C1.B9 1564.32,2817.58 1564.32,2789.54 1565.86,2788.01 1565.86,2770 1594.86,2741 1727,2741 1736,2750 1736,2785.87 1750.99,2800.85 1751.49,2800.85 1752.39,2801.76 USB-C1.A9 1752.39,2866.39 1774,2888 1774,2896
  Top Layer w15: D3.2 1475.39,3575.39 1503,3603 1708.21,3603 1717,3611.79 v1(1717,3620) 1717,3661.82 U2.1 ; D1.4 1759.6,3006.4 1774,2992 ; 1774,2896 1774,2992 ; v1(1845,3350) 1885.42,3350 C3.2 ; R3.2 2066.4,3128.79 2057.61,3120 1902,3120 1774,2992
  Bottom Layer w15: v1(1717,3620) 1759,3620 1845,3534 v1(1845,3350) 1844,3349 1844,3065 v1(1843,3064)
VN: J1.4 MD1.5 | length 344.5
  Top Layer w15: J1.4 1153,4300 1169.41,4316.41 1169.41,4365.21 1224.6,4420.4 1224.6,4457.13 1240,4472.53 MD1.5@1322.89,4472.53
VP: J1.3 MD1.4 | length 290.9
  Top Layer w15: J1.3 1153,4400 1198,4445 1198,4491 1227,4520 1311.16,4520 MD1.4
pads on no net: *1.7 *1.8 *1.9 *1.10 *1.11 *1.12 *1.15 BOOT.MH1 BOOT.MH2 MD1.32 RST.MH1 RST.MH2 U1.4 U2.2 USB-C1.A8 USB-C1.B8 USB-C1.S1@1482,2631 USB-C1.S1@1822,2632 USB-C1.S2@1482,2797 USB-C1.S2@1822,2797 USB-C1.Un1 USB-C1.Un2

## Polygon pours and split planes (outlines as drawn)
3V3 on Top Layer "3V3_L01_P001" (solid, pour order 1): 1096,2528 cw(c1096,2576) 1048,2576 1048,4667 cw(c1097,4667) 1097,4716 2216,4716 cw(c2216,4680) 2252,4680 2252,2568 cw(c2212,2568) 2212,2528
GND on Bottom Layer "GND_L02_P000" (solid, pour order 0): 1096,2528 cw(c1096,2576) 1048,2576 1048,4667 cw(c1097,4667) 1097,4716 2216,4716 cw(c2216,4680) 2252,4680 2252,2568 cw(c2212,2568) 2212,2528

## Keep-outs
Keep-Out Layer:
  lines w10: 2211.54,2528.06 ccw(c2211.54,2568.06) 2251.54,2568.06 2251.54,4680.06 ccw(c2215.54,4680.06) 2215.54,4716.06 2202.54,4716.06 1096.54,4716.06 ccw(c1096.54,4667.06) 1047.54,4667.06 1047.54,2576.06 ccw(c1095.54,2576.06) 1095.54,2528.06 1110.54,2528.06 2212.54,2528.06

## Silkscreen, mask and mechanical layers (free items; w line width, h text height)
Top Overlay:
  text "3V3" at 1192.99,4571 h40 r90
  text "GND" at 2147,4555 h40 r90
  text "23" at 2147,4472 h40 r90
  text "EN" at 1192.99,4469 h40 r90
  text "22" at 2147,4373 h40 r90
  text "VP" at 1192.99,4370 h40 r90
  text "TX" at 2147,4270 h40 r90
  text "VN" at 1192.99,4266 h40 r90
  text "RX" at 2147,4171 h40 r90
  text "34" at 1192.99,4166 h40 r90
  text "21" at 2147,4075 h40 r90
  text "35" at 1192.99,4067 h40 r90
  text "32" at 1192.99,3967 h40 r90
  text "GND" at 2147,3956 h40 r90
  text "19" at 2147,3872 h40 r90
  text "33" at 1192.99,3870 h40 r90
  text "18" at 2147,3772 h40 r90
  text "25" at 1192.99,3767 h40 r90
  text "5" at 2147,3689 h40 r90
  text "26" at 1192.99,3666 h40 r90
  text "17" at 2147,3580 h40 r90
  text "27" at 1192.99,3574 h40 r90
  text "16" at 2147,3470 h40 r90
  text "14" at 1192.99,3468 h40 r90
  text "4" at 2147,3387 h40 r90
  text "12" at 1192.99,3382 h40 r90
  text "5" at 2147,3282 h40 r90
  text "GND" at 1190.99,3247 h38 r90
  text "2" at 2147,3187 h40 r90
  text "15" at 1192.99,3165 h40 r90
  text "D2" at 1192.99,3071 h40 r90
  text "15" at 2147,3062 h40 r90
  text "D3" at 1192.99,2969 h40 r90
  text "SD1" at 2147,2951 h40 r90
  text "CMD" at 1192.99,2844 h40 r90
  text "SD0" at 2147,2830 h40 r90
  text "X" at 2120.34,2773 h40
  text "5V" at 1192.99,2760 h40 r90
Bottom Overlay:
  region: 310 vertices and 0 holes, not listed, extent 1522.74,2572.88 1779.74,2841.74
  text "D&E en" at 1759.59,2915 h40
  text "Guate" at 1736.27,2863 h40

## Text inside footprints (layer, text, board x,y; h text height)
U1: Mechanical 13 "*" at 1549,3526.72 h50